# Altium PCB AMSController.PcbDoc (part 1 of 2)
Units mm, origin at the board's own origin, x right, y up, seen from the top; angles counter-clockwise.
Board outline 99 x 99 mm, 4 copper layers (Top Layer, Internal Plane 1, Internal Plane 2, Bottom Layer), stack 0.462 mm thick; 150 components, 143 nets, 485 pads, 129 vias.
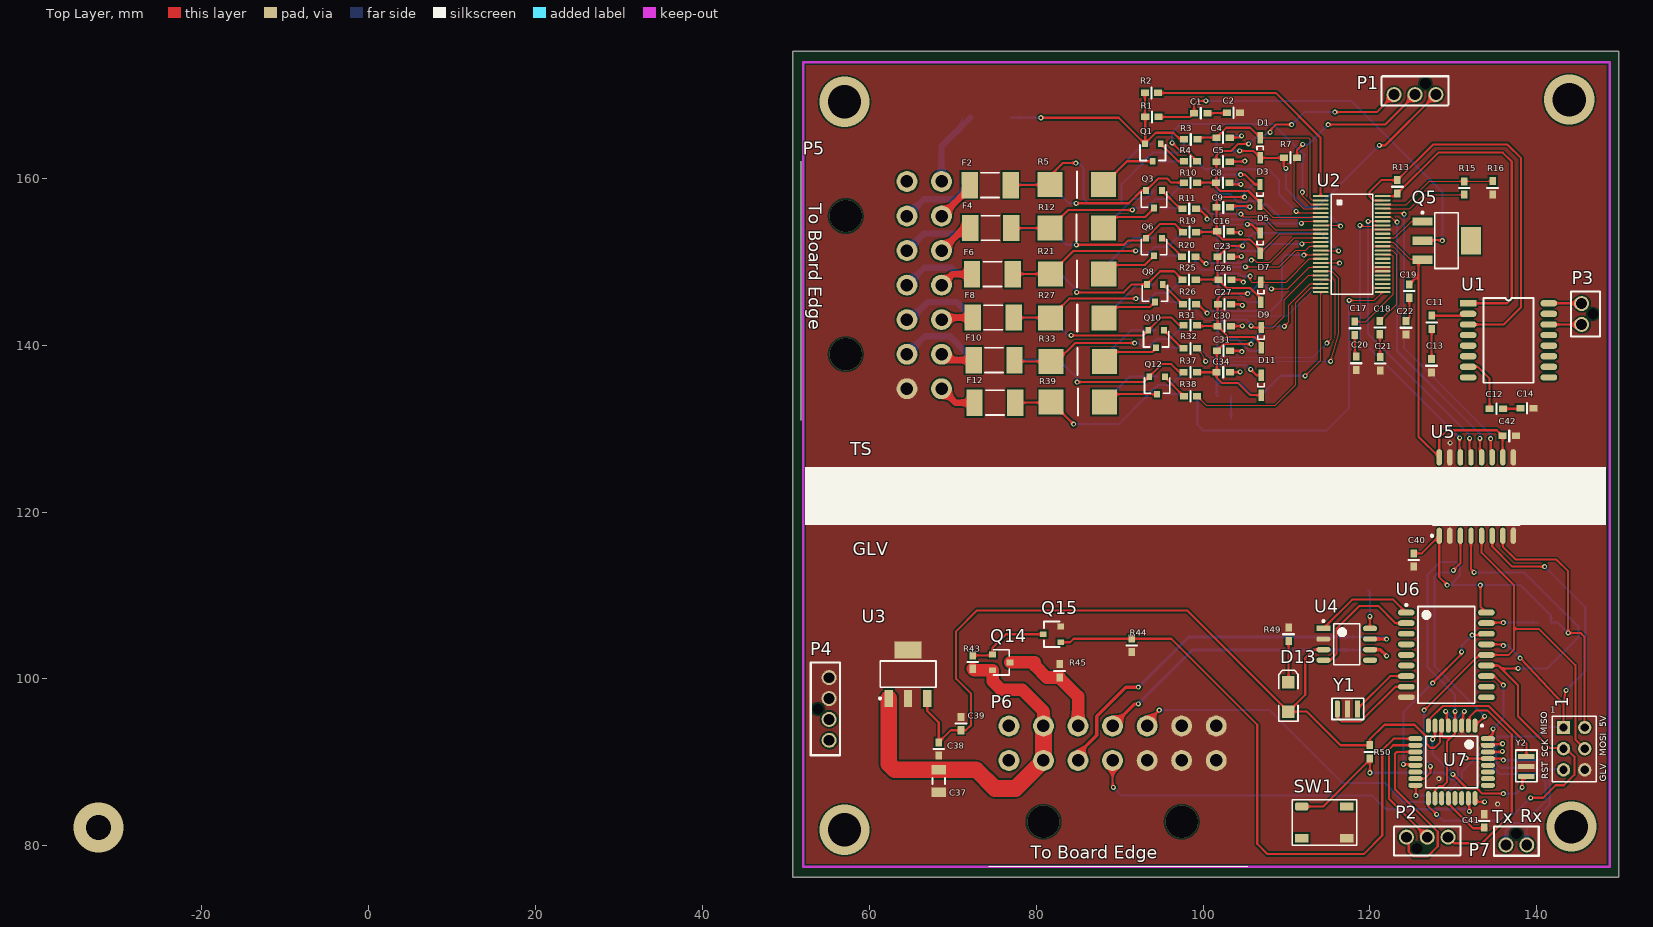
[diagram p0: Top Layer view]
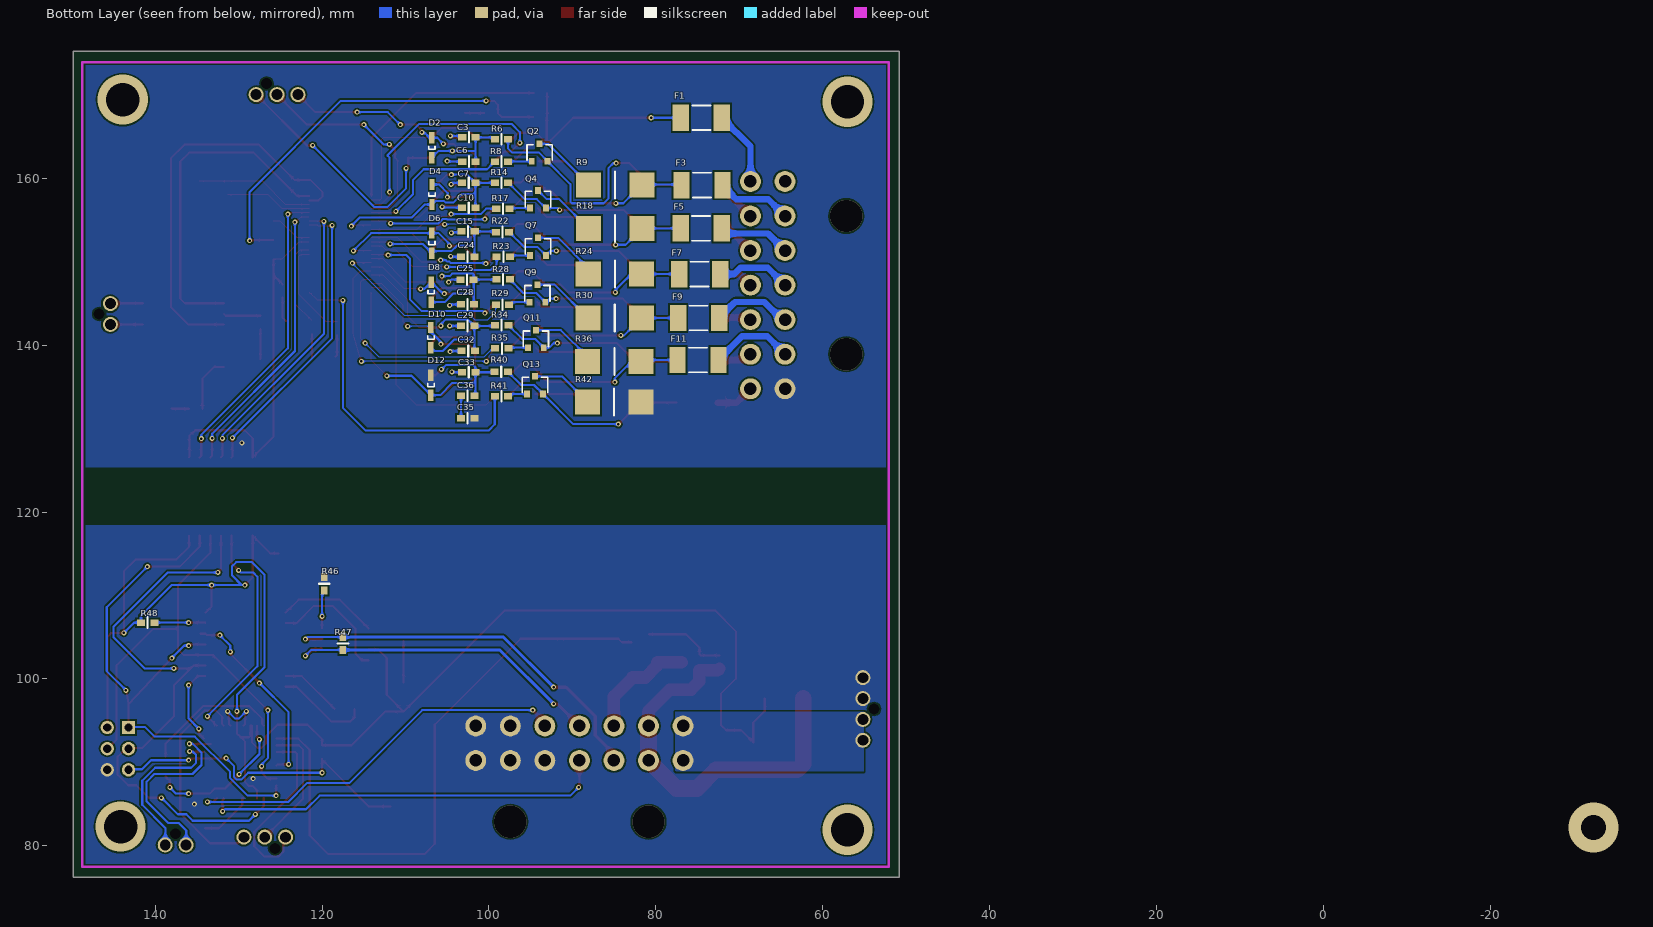
[diagram p1: Bottom Layer view, seen from below]
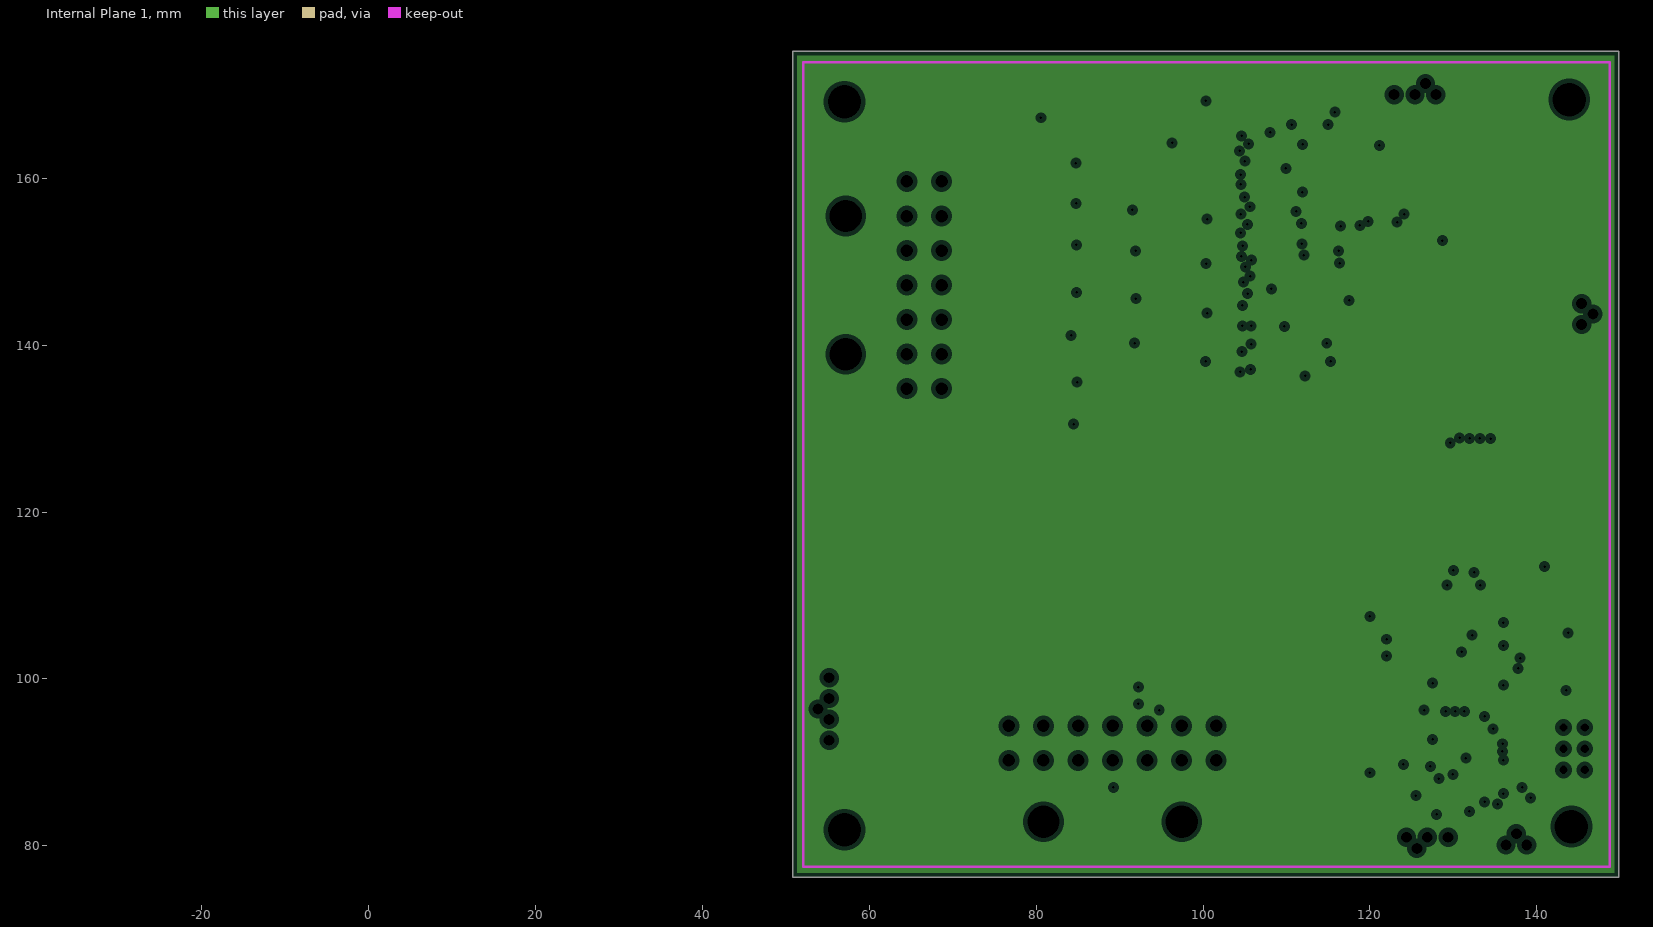
[diagram p2: Internal Plane 1, clearances drawn from the general rule]
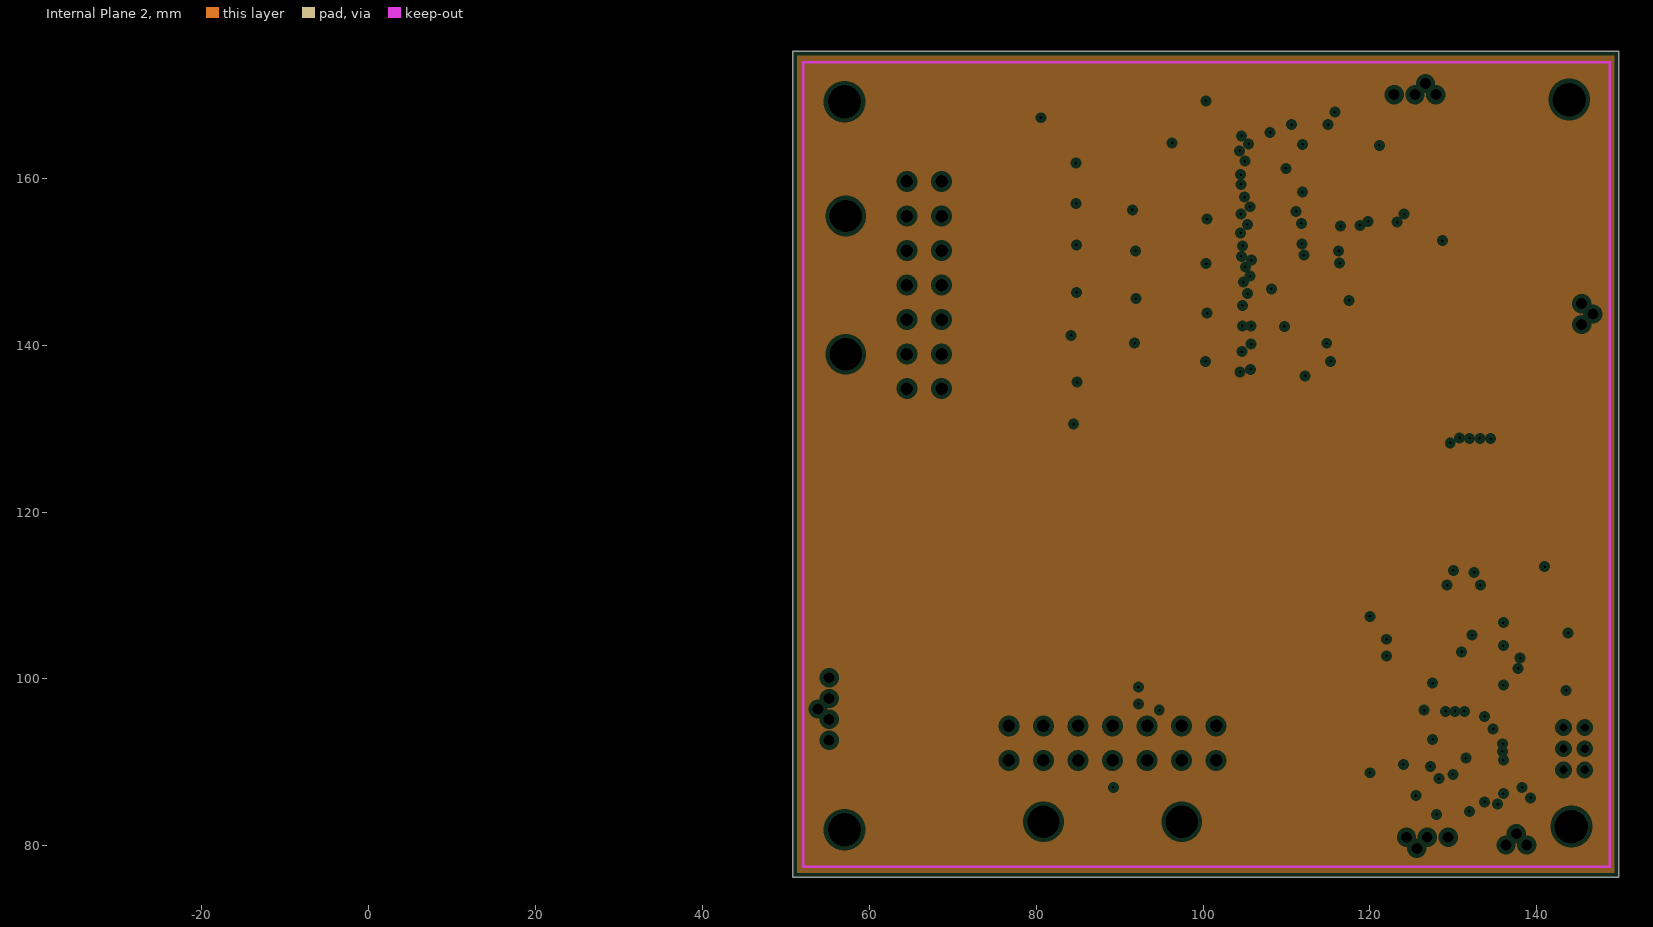
[diagram p3: Internal Plane 2, clearances drawn from the general rule]

## Layer stack, top to bottom
Top Solder: solder mask 0.0102, Solder Resist, Dk 3.5
Top Layer: signal copper 0.0356
Internal Plane 1: plane copper 0.0356
Internal Plane 2: plane copper 0.0356
Dielectric 1: dielectric 0.32, FR-4, Dk 4.8
Bottom Layer: signal copper 0.0356
Bottom Solder: solder mask 0.0102, Solder Resist, Dk 3.5

## Board outline
50.8,76.2 149.8,76.2 149.8,175.2 50.8,175.2

## Design rules (kind name [scope] priority, off if disabled: settings)
Clearance [All] p1: gap=0.2 ignorepadtopadclearanceinfootprint=FALSE
Clearance Clearance_1 [All] p2 off: gap=0.254 ignorepadtopadclearanceinfootprint=FALSE except(0: Arc-Hole Track-Hole SMDPad-Hole THPad-Hole Via-Hole Fill-Hole Poly-Hole Region-Hole Text-Hole)
DiffPairsRouting [All] p1: maxlimit=0.254 minlimit=0.127 mostfreqgap=0.254 toplayer_minwidth=0.127 toplayer_maxwidth=0.381 toplayer_prefwidth=0.25 bottomlayer_minwidth=0.127 bottomlayer_maxwidth=0.381 bottomlayer_prefwidth=0.25 maxuncoupledlength=12.7
HoleSize [All] p1: absolutevalues=TRUE maxlimit=4.5 minlimit=0.025 maxpercent=80.000 minpercent=20.000
MinimumSolderMaskSliver [All] p1: minsoldermaskwidth=0.04
PlaneClearance [All] p1: clearance=0.508
PlaneConnect [All] p1: planeconnectstyle=Relief reliefexpansion=0.508 reliefentries=4 reliefconductorwidth=0.254 reliefairgap=0.254
PolygonConnect [All] p1: connectstyle=Direct reliefconductorwidth=0.5 reliefentries=4 polygonreliefangle="90 Angle" airgapwidth=0.5
RoomDefinition CellMonitor1 [InComponentClass('CellMonitor1')] p1 off: confinementstyle=ConfineIn formatcopy=TRUE lockcomponents=FALSE outline 0,0 50.8,0 50.8,25.4 0,25.4
RoutingVias [All] p1: holewidth=0.3 width=0.6 viastyle="Through Hole" minholewidth=0.3 minwidth=0.6 maxholewidth=0.711 maxwidth=1.27
SilkToSolderMaskClearance [IsPad] p1: minsilkscreentomaskgap=0.18 clearancetoexposedcopper=TRUE
SolderMaskExpansion [All] p1: expansion=0.102
Width [All] p1: maxlimit=10 minlimit=0.127 preferedwidth=0.25
24 further rules are at their usual default settings.

## Classes and differential pairs
component class CellMonitor1: C1 C2 C3 C4 C5 C6 C7 C8 C9 C10 C11 C12 C13 C14 C15 C16 C17 C18 C19 C20 C21 C22 C23 C24 C25 C26 C27 C28 C29 C30 C31 C32 C33 C34 C35 C36 D1 D2 D3 D4 D5 D6 D7 D8 D9 D10 D11 D12 F1 F2 F3 F4 F5 F6 F7 F8 F9 F10 F11 F12 Q1 Q2 Q3 Q4 Q5 Q6 Q7 Q8 Q9 Q10 Q11 Q12 Q13 R1 R2 R3 R4 R5 R6 R7 R8 R9 R10 R11 R12 R13 R14 R15 R16 R17 R18 R19 R20 R21 R22 R23 R24 R25 R26 R27 R28 R29 R30 R31 R32 R33 R34 R35 R36 R37 R38 R39 R40 R41 R42 U1 U2
component class Controller: C37 C38 C39 C40 C41 C42 D13 Q14 Q15 R43 R44 R45 R46 R47 R48 R49 R50 SW1 U3 U4 U5 U6 U7 Y1 Y2
component class IO: 1 P1 P2 P3 P4 P5 P6 P7
differential pair CAN: +CAN_P -CAN_N
differential pair isoSPI: +isoSPI_P -isoSPI_N

## Components (designator, comment, footprint, x,y, rotation, side; value= is the part's Value field where it differs from the comment)
1 "ICSP Connector" "ICSP Connector" 143.225,89.095 r90 top
C1 "Cap" "0603 IMPERIAL" 99.725,167.8 r0 top value=0.22uF
C2 "Cap" "0603 IMPERIAL" 103.65,167.85 r0 top value=0.22uF
C3 "Cap" "0603 IMPERIAL" 102.4,164.9 r180 bottom value=22nF
C4 "Cap" "0603 IMPERIAL" 102.4,164.875 r0 top value=22nF
C5 "Cap" "0603 IMPERIAL" 102.4,162 r180 top value=22nF
C6 "Cap" "0603 IMPERIAL" 102.4,162 r0 bottom value=22nF
C7 "Cap" "0603 IMPERIAL" 102.425,159.45 r180 bottom value=22nF
C8 "Cap" "0603 IMPERIAL" 102.375,159.475 r0 top value=22nF
C9 "Cap" "0603 IMPERIAL" 102.425,156.5 r180 top value=22nF
C10 "Cap" "0603 IMPERIAL" 102.425,156.475 r0 bottom value=22nF
C11 "Cap" "0603 IMPERIAL" 127.4,142.725 r270 top value=22nF
C12 "Cap" "0603 IMPERIAL" 135.15,132.375 r0 top value=22nF
C13 "Cap" "0603 IMPERIAL" 127.375,137.525 r270 top value=22nF
C14 "Cap" "0603 IMPERIAL" 138.825,132.425 r0 top value=22nF
C15 "Cap" "0603 IMPERIAL" 102.5,153.625 r180 bottom value=22nF
C16 "Cap" "0603 IMPERIAL" 102.5,153.625 r0 top value=22nF
C17 "Cap" "0603 IMPERIAL" 118.2,142.025 r270 top value=2.2uF
C18 "Cap" "0603 IMPERIAL" 121.2,142.1 r270 top value=2.2uF
C19 "Cap" "0603 IMPERIAL" 124.725,146.475 r270 top value=2.2uF
C20 "Cap" "0603 IMPERIAL" 118.375,137.825 r270 top value=2.2uF
C21 "Cap" "0603 IMPERIAL" 121.225,137.775 r270 top value=2.2uF
C22 "Cap" "0603 IMPERIAL" 124.325,142.075 r270 top value=2.2uF
C23 "Cap" "0603 IMPERIAL" 102.55,150.575 r180 top value=22nF
C24 "Cap" "0603 IMPERIAL" 102.55,150.575 r0 bottom value=22nF
C25 "Cap" "0603 IMPERIAL" 102.625,147.85 r180 bottom value=22nF
C26 "Cap" "0603 IMPERIAL" 102.625,147.85 r0 top value=22nF
C27 "Cap" "0603 IMPERIAL" 102.575,144.9 r180 top value=22nF
C28 "Cap" "0603 IMPERIAL" 102.575,144.875 r0 bottom value=22nF
C29 "Cap" "0603 IMPERIAL" 102.55,142.3 r180 bottom value=22nF
C30 "Cap" "0603 IMPERIAL" 102.55,142.28 r0 top value=22nF
C31 "Cap" "0603 IMPERIAL" 102.45,139.325 r180 top value=22nF
C32 "Cap" "0603 IMPERIAL" 102.475,139.3 r0 bottom value=22nF
C33 "Cap" "0603 IMPERIAL" 102.425,136.75 r180 bottom value=22nF
C34 "Cap" "0603 IMPERIAL" 102.425,136.75 r0 top value=22nF
C35 "Cap" "0603 IMPERIAL" 102.55,131.225 r180 bottom value=22nF
C36 "Cap" "0603 IMPERIAL" 102.55,133.925 r0 bottom value=22nF
C37 "0.33uF" C1206 68.326,87.757 r90 top
C38 "0.1uF" "0603 IMPERIAL" 68.326,91.598 r270 top
C39 "0.1uF" "0603 IMPERIAL" 70.993,94.646 r90 top
C40 "0.1uF" "0603 IMPERIAL" 125.25,114.25 r90 top
C41 "0.1uF" "0603 IMPERIAL" 133.675,82.975 r90 top
C42 "0.1uF" "0603 IMPERIAL" 136.7,129.116 r180 top
D1 "6.8V" SOD-323 106.85,164.85 r270 top
D2 "6.8V" SOD-323 106.85,162.45 r90 bottom
D3 "6.8V" SOD-323 106.825,156.85 r90 top
D4 "6.8V" SOD-323 106.825,156.85 r90 bottom
D5 "6.8V" SOD-323 106.85,151.025 r90 top
D6 "6.8V" SOD-323 106.85,151.025 r90 bottom
D7 "6.8V" SOD-323 106.925,145.15 r90 top
D8 "6.8V" SOD-323 106.925,145.15 r90 bottom
D9 "6.8V" SOD-323 106.95,139.7 r90 top
D10 "6.8V" SOD-323 106.95,139.7 r90 bottom
D11 "6.8V" SOD-323 106.95,134 r90 top
D12 "6.8V" SOD-323 106.95,134 r90 bottom
D13 "LED2" 3.2X1.6X1.1 110.236,97.818 r90 top
F1 "0451.500NRL" 0451.500NRL 74.545,167.25 r0 bottom
F2 "0451.500NRL" 0451.500NRL 74.48,159.175 r0 top
F3 "0451.500NRL" 0451.500NRL 74.47,159.175 r0 bottom
F4 "0451.500NRL" 0451.500NRL 74.545,154.025 r0 top
F5 "0451.500NRL" 0451.500NRL 74.57,154 r0 bottom
F6 "0451.500NRL" 0451.500NRL 74.755,148.5 r0 top
F7 "0451.500NRL" 0451.500NRL 74.745,148.5 r0 bottom
F8 "0451.500NRL" 0451.500NRL 74.855,143.3 r0 top
F9 "0451.500NRL" 0451.500NRL 74.87,143.25 r0 bottom
F10 "0451.500NRL" 0451.500NRL 74.955,138.2 r0 top
F11 "0451.500NRL" 0451.500NRL 74.945,138.225 r0 bottom
F12 "0451.500NRL" 0451.500NRL 75.055,133.1 r0 top
P1 "Header 3" "3-pin Vertical nanofit" 122.9,170.025 r0 top
P2 "Header 3" "3-pin Vertical nanofit" 129.373,81.026 r180 top
P3 "Header 2" "2 Pin Nanofit" 145.4,147.45 r270 top
P4 "Header 4" "4 Pin Vertical Nanofit" 55.188,92.643 r90 top
P5 "14 Pin Connector" "TE Connectivity 14 Pin" 49.816,142.013 r270 top
P6 "14 Pin Connector" "TE Connectivity 14 Pin" 94.334,75.521 r0 top
P7 "Header 7" "2 Pin Nanofit" 133.825,80.125 r0 top
Q1 "P-Channel" SOT23F 93.975,163.082 r270 top
Q2 "P-Channel" SOT23F 93.925,163.075 r90 bottom
Q3 "P-Channel" SOT23F 94.125,157.475 r270 top
Q4 "P-Channel" SOT23F 94.125,157.475 r90 bottom
Q5 "NPN" SOT223_N 129.185,152.525 r0 top
Q6 "P-Channel" SOT23F 94.125,151.775 r270 top
Q7 "P-Channel" SOT23F 94.125,151.8 r90 bottom
Q8 "P-Channel" SOT23F 94.225,146.225 r270 top
Q9 "P-Channel" SOT23F 94.2,146.2 r90 bottom
Q10 "P-Channel" SOT23F 94.375,140.725 r270 top
Q11 "P-Channel" SOT23F 94.375,140.75 r90 bottom
Q12 "P-Channel" SOT23F 94.5,135.175 r270 top
Q13 "P-Channel" SOT23F 94.475,135.2 r90 bottom
Q14 "MOSFET-P" SOT23f 75.819,101.981 r0 top
Q15 "MOSFET-N" SOT23f 81.881,105.344 r180 top
R1 "Res1" "0603 IMPERIAL" 93.875,167.347 r0 top value=140
R2 "Res1" "0603 IMPERIAL" 93.825,170.225 r0 top value=140
R3 "Res1" "0603 IMPERIAL" 98.525,164.65 r0 top value=100
R4 "Res1" "0603 IMPERIAL" 98.5,162.025 r0 top value=3.3K
R5 "Res1" "2512 IMPERIAL" 84.875,159.225 r0 top value=12
R6 "Res1" "0603 IMPERIAL" 98.5,164.675 r0 bottom value=100
R7 "Res1" "0603 IMPERIAL" 110.475,162.475 r0 top value=0
R8 "Res1" "0603 IMPERIAL" 98.5,162 r0 bottom value=3.3K
R9 "Res1" "2512 IMPERIAL" 84.875,159.2 r0 bottom value=12
R10 "Res1" "0603 IMPERIAL" 98.5,159.475 r0 top value=100
R11 "Res1" "0603 IMPERIAL" 98.35,156.35 r0 top value=3.3K
R12 "Res1" "2512 IMPERIAL" 84.85,154.025 r0 top value=12
R13 "120" "0603 IMPERIAL" 123.293,158.975 r270 top
R14 "Res1" "0603 IMPERIAL" 98.5,159.475 r0 bottom value=100
R15 "1K" "0603 IMPERIAL" 131.302,158.829 r90 top
R16 "1K" "0603 IMPERIAL" 134.7,158.85 r270 top
R17 "Res1" "0603 IMPERIAL" 98.325,156.35 r0 bottom value=3.3K
R18 "Res1" "2512 IMPERIAL" 84.875,153.975 r0 bottom value=12
R19 "Res1" "0603 IMPERIAL" 98.375,153.55 r0 top value=100
R20 "Res1" "0603 IMPERIAL" 98.3,150.575 r0 top value=3.3K
R21 "Res1" "2512 IMPERIAL" 84.9,148.525 r0 top value=12
R22 "Res1" "0603 IMPERIAL" 98.375,153.55 r0 bottom value=100
R23 "Res1" "0603 IMPERIAL" 98.275,150.575 r0 bottom value=3.3K
R24 "Res1" "2512 IMPERIAL" 84.9,148.525 r0 bottom value=12
R25 "Res1" "0603 IMPERIAL" 98.325,147.85 r0 top value=100
R26 "Res1" "0603 IMPERIAL" 98.375,144.9 r0 top value=3.3K
R27 "Res1" "2512 IMPERIAL" 84.925,143.25 r0 top value=12
R28 "Res1" "0603 IMPERIAL" 98.3,147.875 r0 bottom value=100
R29 "Res1" "0603 IMPERIAL" 98.375,144.85 r0 bottom value=3.3K
R30 "Res1" "2512 IMPERIAL" 84.925,143.25 r0 bottom value=12
R31 "Res1" "0603 IMPERIAL" 98.475,142.4 r0 top value=100
R32 "Res1" "0603 IMPERIAL" 98.475,139.6 r0 top value=3.3K
R33 "Res1" "2512 IMPERIAL" 84.975,138.05 r0 top value=12
R34 "Res1" "0603 IMPERIAL" 98.475,142.4 r0 bottom value=100
R35 "Res1" "0603 IMPERIAL" 98.45,139.6 r0 bottom value=3.3K
R36 "Res1" "2512 IMPERIAL" 84.975,138.05 r0 bottom value=12
R37 "Res1" "0603 IMPERIAL" 98.475,136.75 r0 top value=100
R38 "Res1" "0603 IMPERIAL" 98.5,133.875 r0 top value=3.3K
R39 "Res1" "2512 IMPERIAL" 85,133.2 r0 top value=12
R40 "Res1" "0603 IMPERIAL" 98.525,136.8 r0 bottom value=100
R41 "Res1" "0603 IMPERIAL" 98.5,133.875 r0 bottom value=3.3K
R42 "Res1" "2512 IMPERIAL" 85,133.2 r0 bottom value=12
R43 "10k" "0603 IMPERIAL" 72.39,102.012 r270 top value=10K
R44 "100k" "0603 IMPERIAL" 91.44,104.013 r90 top value=10K
R45 "100k" "0603 IMPERIAL" 82.804,100.965 r270 top value=100K
R46 "16.9K" "0603 IMPERIAL" 119.75,111.4 r90 bottom
R47 "120" "0603 IMPERIAL" 117.5,104.25 r90 bottom
R48 "10K" "0603 IMPERIAL" 140.9,106.75 r0 bottom
R49 "1K" "0603 IMPERIAL" 110.25,105.35 r270 top
R50 "10K" "0603 IMPERIAL" 120,91.25 r90 top
SW1 "PTS525SM15SMTR2" PTS525SM15SMTR2 111.821,84.709 r0 top
U1 "TG110-AE050N5" "Halo N5" 131.775,145.015 r0 top
U2 "LTC6811-1" SSOP-48 114.1,157.85 r0 top
U3 "UA7805CKTTR" SOT223 64.643,100.838 r90 top
U4 "MCP2551-E/SN" SOIC127P600X175-8M 117.221,104.14 r0 top
U5 "ISO7341CDW" SOIC16-WB 132.75,121.85 r90 top
U6 "MCP2515-E/ST" SOIC127P1030X265-18M 129.159,102.87 r0 top
U7 "ATMEGA328P" "ATMEGA328P-15AZ - 2" 129.794,90.043 r270 top
Y1 "CSTCE16M0V53-R0" CSTCE16M0V53-R0 116.091,96.393 r0 top
Y2 "CSTCE16M0V53-R0" CSTCE16M0V53-R0 138.75,88.3 r90 top

## Footprints (in the part's own frame and the unit in brackets; to place one, negate y for a bottom-side part, rotate by r counter-clockwise, add the part's x,y. Pads: shape width x height; smd on the part's side, far side on the other; paste and mask are expansions set on the pad)
"2 Pin Nanofit" [mm]
  round 1.8 hole 1.3: 1(2.475,-0.025) 2(4.975,-0.025)
  round 0 hole 1.3: 3(3.725,1.315)
  silkscreen extent 1.02,-1.33 6.4,2.17
"3-pin Vertical nanofit" [mm]
  round 1.8 hole 1.3: 1(0,0) 2(2.5,0) 3(5,0)
  round 0 hole 1.3: 6(3.75,1.34)
  silkscreen extent -1.5,-1.3 6.5,2.2
3.2X1.6X1.1 [mm] "SMT LED; 2 Flat Leads"
  rect 1.5x1.5 smd: 1(-1.75,0) 2(1.75,0)
  silkscreen extent -2.9,-1.15 3.2,1.15
"4 Pin Vertical Nanofit" [mm]
  round 1.8 hole 1.3: 1(0,0) 2(2.5,0) 3(5,0) 4(7.5,0)
  round 0 hole 1.3: 6(3.75,1.34)
  silkscreen extent -1.8,-1.3 9.3,2.2
0451.500NRL [mm] "Fuse Board MNT 500mA 125VAC/DC"
  rect 1.96x3.15 smd: 1(-2.455,0) 2(2.455,0)
  silkscreen extent -1.1,-1.48 1.1,1.47, body extent -3.15,-1.47 3.15,1.47, height 2.94
"0603 IMPERIAL" [mil]
  rect 38x31 smd: 1(-31.5,0) 2(31.5,0)
  silkscreen extent 0,-25 0,25
"2512 IMPERIAL" [mm]
  rect 3x3 smd: 1(-3.2,0) 2(3.2,0)
  silkscreen extent 0,-1.6 0,1.6
"ATMEGA328P-15AZ - 2" [mm] "TQFP, 32-Leads, Body 7.00x7.00mm, Pitch 0.80mm, IPC Low Density"
  oval 1.7x0.6 smd: 1(-4.35,2.8) 2(-4.35,2) 3(-4.35,1.2) 4(-4.35,0.4) 5(-4.35,-0.4) 6(-4.35,-1.2) 7(-4.35,-2) 8(-4.35,-2.8) 17(4.35,-2.8) 18(4.35,-2) 19(4.35,-1.2) 20(4.35,-0.4) 21(4.35,0.4) 22(4.35,1.2) 23(4.35,2) 24(4.35,2.8)
  oval 0.6x1.7 smd: 9(-2.8,-4.35) 10(-2,-4.35) 11(-1.2,-4.35) 12(-0.4,-4.35) 13(0.4,-4.35) 14(1.2,-4.35) 15(2,-4.35) 16(2.8,-4.35) 25(2.8,4.35) 26(2,4.35) 27(1.2,4.35) 28(0.4,4.35) 29(-0.4,4.35) 30(-1.2,4.35) 31(-2,4.35) 32(-2.8,4.35)
  silkscreen extent -4.47,-3.1 3.1,3.77, body extent -3.5,-3.5 3.5,3.5, height 1.2
C1206 [mm] "Chip Capacitor, Body 3.2x1.6mm, IPC High Density"
  rect 1.1x1.7 smd: 1(-1.35,0) 2(1.35,0)
  silkscreen extent -0.4,-0.75 0.4,0.75, body extent -1.7,-0.9 1.7,0.9, height 1.3
CSTCE16M0V53-R0 [mm] "16MHz Resonator"
  rrect50% 0.6x2 smd: 1(0,0)
  rect 0.6x2 smd: 2(1.2,0) 3(2.4,0)
  silkscreen extent -0.64,-1.27 3.17,1.27
"Halo N5" [mm]
  rect 2x0.76 smd: 1(0,0)
  oval 2x0.76 smd: 2(0,-1.27) 3(0,-2.54) 4(0,-3.81) 5(0,-5.08) 6(0,-6.35) 7(0,-7.62) 8(0,-8.89) 9(9.67,-8.89) 10(9.67,-7.62) 11(9.67,-6.35) 12(9.67,-5.08) 13(9.67,-3.81) 14(9.67,-2.54) 15(9.67,-1.27) 16(9.67,0)
  silkscreen extent 1.84,-9.53 7.84,0.64
"ICSP Connector" [mm]
  rect 1.6x1.6 hole 1: 1(5.08,0.025)
  round 1.6 hole 1: 2(5.08,-2.515) 3(2.54,0.025) 4(2.54,-2.515) 5(0,0.025) 6(0,-2.515)
  silkscreen extent -1.45,-3.91 6.45,1.4
PTS525SM15SMTR2 [mm] "Tact Switch"
  rrect50% 1.6x1 smd: 1(0,0)
  rect 1.6x1 smd: 2(5.4,0) 3(0,-3.8) 4(5.4,-3.8)
  silkscreen extent -1.12,-4.65 6.58,0.81
SOD-323 [mm] "FLYBACK DIODE"
  rect 1.35x0.65 smd: 1(2.4,0) 2(0,0)
  silkscreen extent 1.02,-0.38 1.4,0.38
SOIC16-WB [mm] "Wide Body 16 pin SOIC"
  oval 1.95x0.65 smd: 1(-4.7,4.445) 2(-4.7,3.175) 3(-4.7,1.905) 4(-4.7,0.635) 5(-4.7,-0.635) 6(-4.7,-1.905) 7(-4.7,-3.175) 8(-4.7,-4.445) 9(4.7,-4.445) 10(4.7,-3.175) 11(4.7,-1.905) 12(4.7,-0.635) 13(4.7,0.635) 14(4.7,1.905) 15(4.7,3.175) 16(4.7,4.445)
  silkscreen extent -4.82,-5.2 3.4,5.44, body extent -3.8,-5.2 3.8,5.2, height 2.65
SOIC127P600X175-8M [mm] "SOIC, 8-Leads, Body 4.90x3.90mm, Pitch 1.27mm, IPC Low Density"
  rect 1.7x0.65 smd: 1(-2.8,1.905)
  oval 1.7x0.65 smd: 2(-2.8,0.635) 3(-2.8,-0.635) 4(-2.8,-1.905) 5(2.8,-1.905) 6(2.8,-0.635) 7(2.8,0.635) 8(2.8,1.905)
  silkscreen extent -2.92,-2.45 1.55,2.9, body extent -1.95,-2.45 1.95,2.45, height 1.75
SOIC127P1030X265-18M [mm] "SOIC, 18-Leads, Body 11.50x7.50mm, Pitch 1.27mm, IPC Low Density"
  oval 2x0.7 smd: 1(-4.8,5.08) 2(-4.8,3.81) 3(-4.8,2.54) 4(-4.8,1.27) 5(-4.8,0) 6(-4.8,-1.27) 7(-4.8,-2.54) 8(-4.8,-3.81) 9(-4.8,-5.08) 10(4.8,-5.08) 11(4.8,-3.81) 12(4.8,-2.54) 13(4.8,-1.27) 14(4.8,0) 15(4.8,1.27) 16(4.8,2.54) 17(4.8,3.81) 18(4.8,5.08)
  silkscreen extent -4.92,-5.8 3.4,6.1, body extent -3.8,-5.8 3.8,5.8, height 2.65
SOT23F [mm] "SOT23, 3-Leads, Body 2.90x2.40mm, Pitch 0.95mm, IPC Medium Density"
  rect 0.8x0.7 smd: 1(1.05,0) 2(-1.05,0.95) 3(-1.05,-0.95)
  silkscreen extent -0.92,-1.52 0.95,1.52
SOT23f [mm] "SOT23, 3-Leads, Body 2.90x2.40mm, Pitch 0.95mm, IPC Medium Density"
  rect 0.8x0.7 smd: 1(1.05,0) 2(-1.05,0.95) 3(-1.05,-0.95)
  silkscreen extent -0.92,-1.52 0.95,1.52
SOT223 [mm] "SOT223, 4-Leads, Body 6.50x7.00mm (avg), Pitch 2.30mm, IPC Low Density"
  rect 2.05x1 smd: 1(-3.175,2.3) 2(-3.175,0) 3(-3.175,-2.3)
  rect 2.05x3.25 smd: 4(2.6,0)
  silkscreen extent -3.3,-3.35 1.3,3.47, body extent -1.85,-3.35 1.3,3.35, height 1.8
SOT223_N [mm] "SOT223, 4-Leads, Body 6.5x3.5mm, Pitch 2.3mm, Lead Span 7mm, IPC Medium Density"
  rect 2.4x1 smd: 1(-2.9,2.3) 2(-2.9,0) 3(-2.9,-2.3)
  rect 2.4x3.3 smd: 4(2.9,0)
  silkscreen extent -3.02,-3.35 1.4,3.47, body extent -1.85,-3.35 1.85,3.35, height 1.7
SSOP-48 [mm]
  rect 1.9x0.25 smd: 1(0,0)
  oval 1.9x0.25 smd: 2(0,-0.5) 3(0,-1) 4(0,-1.5) 5(0,-2) 6(0,-2.5) 7(0,-3) 8(0,-3.5) 9(0,-4) 10(0,-4.5) 11(0,-5) 12(0,-5.5) 13(0,-6) 14(0,-6.5) 15(0,-7) 16(0,-7.5) 17(0,-8) 18(0,-8.5) 19(0,-9) 20(0,-9.5) 21(0,-10) 22(0,-10.5) 23(0,-11) 24(0,-11.5) 25(7.425,-11.5) 26(7.425,-11) 27(7.425,-10.5) 28(7.425,-10) 29(7.425,-9.5) 30(7.425,-9) 31(7.425,-8.5) 32(7.425,-8) 33(7.425,-7.5) 34(7.425,-7) 35(7.425,-6.5) 36(7.425,-6) 37(7.425,-5.5) 38(7.425,-5) 39(7.425,-4.5) 40(7.425,-4) 41(7.425,-3.5) 42(7.425,-3) 43(7.425,-2.5) 44(7.425,-2) 45(7.425,-1.5) 46(7.425,-1) 47(7.425,-0.5) 48(7.425,0)
  silkscreen extent 1.25,-11.75 6.25,0.25
"TE Connectivity 14 Pin" [mm]
  round 2.5 hole 1.5: 1(7.24,14.7) 2(7.24,18.84) 3(3.1,14.7) 4(3.1,18.84) 5(-1.04,14.7) 6(-1.04,18.84) 7(-5.18,14.7) 8(-5.18,18.84) 9(-9.32,14.7) 10(-9.32,18.84) 11(-13.46,14.7) 12(-13.46,18.84) 13(-17.6,14.7) 14(-17.6,18.84)
  silkscreen extent -20,2.03 11,2.03

## Part data
1: Supplier Part Number=952-2121-ND
C1 C2: "Capacitor", Supplier Part Number=490-5402-1-ND, LatestRevisionDate=17-Jul-2002, LatestRevisionNote="Re-released for DXP Platform.", PackageDescription="Radial Cap, Thru-Hole; 2 Leads; 0.3 in Pin Spacing", PackageReference=RAD-0.3, Published=8-Jun-2000, Publisher="Altium Limited"
C3 C4 C5 C6 C7 C8 C9 C10 C11 C12 C13 C14 C15 C16 C23 C24 C25 C26 C27 C28 C29 C30 C31 C32 C33 C34 C35 C36: "Capacitor", Supplier Part Number=399-3476-1-ND, LatestRevisionDate=17-Jul-2002, LatestRevisionNote="Re-released for DXP Platform.", PackageDescription="Radial Cap, Thru-Hole; 2 Leads; 0.3 in Pin Spacing", PackageReference=RAD-0.3, Published=8-Jun-2000, Publisher="Altium Limited"
C17 C18 C19 C20 C21 C22: "Capacitor", Supplier Part Number=490-3296-1-ND, LatestRevisionDate=17-Jul-2002, LatestRevisionNote="Re-released for DXP Platform.", PackageDescription="Radial Cap, Thru-Hole; 2 Leads; 0.3 in Pin Spacing", PackageReference=RAD-0.3, Published=8-Jun-2000, Publisher="Altium Limited"
C37: library part "Cap Semi", "Capacitor (Semiconductor SIM Model)", Supplier Part Number=445-4464-1-ND, LatestRevisionDate=29-May-2009, LatestRevisionNote="IPC-7351 Footprint Added.", PackageDescription="Chip Capacitor", PackageReference=C1206, Published=8-Jun-2000, Publisher="Altium Limited"
C38 C39 C40 C41 C42: library part Cap, "Capacitor", Supplier Part Number=399-1095-1-ND, LatestRevisionDate=17-Jul-2002, LatestRevisionNote="Re-released for DXP Platform.", Published=8-Jun-2000, Publisher="Altium Limited"
D1 D2 D3 D4 D5 D6 D7 D8 D9 D10 D11 D12: library part "D Zener", "Zener Diode", Supplier Part Number=568-6455-1-ND, LatestRevisionDate=17-Jul-2002, LatestRevisionNote="Re-released for DXP Platform.", PackageDescription="Diode, Thru-Hole; 2 Leads; 0.7 in Pin Spacing", PackageReference=DIODE-0.7, Published=8-Jun-2000, Publisher="Altium Limited"
D13: "Typical RED, GREEN, YELLOW, AMBER GaAs LED", Supplier Part Number=160-1456-1-ND, LatestRevisionDate=17-Jul-2002, LatestRevisionNote="Re-released for DXP Platform.", PackageDescription="SM LED; 2 Flat Leads", PackageReference=3.2X1.6X1.1, PackageVersion=Feb-2002, Published=8-Jun-2000, Publisher="Altium Limited"
F1 F2 F5 F6 F7 F8 F9 F11: library part "Fuse 1", "Fuse", Supplier Part Number=F5964CT-ND, LatestRevisionDate=17-Jul-2002, LatestRevisionNote="Re-released for DXP Platform.", PackageReference=PIN-W2/E2.8, Published=8-Jun-2000, Publisher="Altium Limited"
F3 F4 F10 F12: library part "Fuse 1", "Fuse", LatestRevisionDate=17-Jul-2002, LatestRevisionNote="Re-released for DXP Platform.", PackageReference=PIN-W2/E2.8, Published=8-Jun-2000, Publisher="Altium Limited"
P1 P2: "Header, 3-Pin", LatestRevisionDate=17-Jul-2002, LatestRevisionNote="Re-released for DXP Platform.", Publisher="Altium Limited"
P3: "Header, 2-Pin", LatestRevisionDate=17-Jul-2002, LatestRevisionNote="Re-released for DXP Platform.", Publisher="Altium Limited"
P4: "Header, 4-Pin", LatestRevisionDate=17-Jul-2002, LatestRevisionNote="Re-released for DXP Platform.", Publisher="Altium Limited"
P5 P6: Supplier Part Number=A32482-ND
P7: library part "Header 2", "Header, 2-Pin", LatestRevisionDate=17-Jul-2002, LatestRevisionNote="Re-released for DXP Platform.", Publisher="Altium Limited"
Q1 Q2 Q3 Q4 Q6 Q7 Q8 Q9 Q10 Q11 Q12 Q13: library part MOSFET-P, "P-Channel MOSFET", Supplier Part Number="BSS308PE H6327CT-ND", LatestRevisionDate=17-Jul-2002, LatestRevisionNote="Re-released for DXP Platform.", PackageDescription="TO, Flat Index; 3 In-Line, Axial Leads; Body Dia. 4.6mm; Lead Dia. 0.5 mm (max)", PackageReference=E3, PackageVersion=1995/1996, Published=8-Jun-2000, Publisher="Altium Limited"
Q5: library part 2N3904, "NPN General Purpose Amplifier", Supplier Part Number=NSV1C201MZ4T1GOSCT-ND, ComponentLink1Description="Manufacturer Link", ComponentLink1URL=http://www.fairchildsemi.com/, ComponentLink2Description=Datasheet, ComponentLink2URL=http://www.fairchildsemi.com/ds/2N%2F2N3904.pdf, DatasheetVersion=1997, LatestRevisionDate=15-Jan-2003, LatestRevisionNote="PCB Footprint 'BCY-W3/D4.7' replaced", PackageDescription="TO, Flat Index; 3 In-Line, Axial Leads; Body Dia. 4.5mm; Leads 0.51 x 0.48 mm (max)", PackageReference=TO-92A, PackageVersion=Sep-1998, Published=8-Jun-2000, Publisher="Altium Limited"
Q14: "P-Channel MOSFET", Supplier Part Number="BSS308PE H6327CT-ND", LatestRevisionDate=17-Jul-2002, LatestRevisionNote="Re-released for DXP Platform.", PackageDescription="TO, Flat Index; 3 In-Line, Axial Leads; Body Dia. 4.6mm; Lead Dia. 0.5 mm (max)", PackageReference=E3, PackageVersion=1995/1996, Published=8-Jun-2000, Publisher="Altium Limited"
Q15: "N-Channel MOSFET", Supplier Part Number=DMN3404LDICT-ND, LatestRevisionDate=17-Jul-2002, LatestRevisionNote="Re-released for DXP Platform.", PackageDescription="TO, Flat Index; 3 In-Line, Axial Leads; Body Dia. 4.6mm; Lead Dia. 0.5 mm (max)", PackageReference=E3, PackageVersion=1995/1996, Published=8-Jun-2000, Publisher="Altium Limited"
R1 R2: "Resistor", Supplier Part Number=P140HCT-ND, LatestRevisionDate=17-Jul-2002, LatestRevisionNote="Re-released for DXP Platform.", PackageDescription="Axial Device, Thru-Hole; 2 Leads; 0.3 in Pin Spacing", PackageReference=AXIAL-0.3, Published=8-Jun-2000, Publisher="Altium Limited"
R3 R6 R10 R14 R19 R22 R25 R28 R31 R34 R37 R40: "Resistor", Supplier Part Number=311-100HRCT-ND, LatestRevisionDate=17-Jul-2002, LatestRevisionNote="Re-released for DXP Platform.", PackageDescription="Axial Device, Thru-Hole; 2 Leads; 0.3 in Pin Spacing", PackageReference=AXIAL-0.3, Published=8-Jun-2000, Publisher="Altium Limited"
R4 R8 R11 R17 R20 R23 R26 R29 R32 R35 R38 R41: "Resistor", Supplier Part Number=311-3.30KHRCT-ND, LatestRevisionDate=17-Jul-2002, LatestRevisionNote="Re-released for DXP Platform.", PackageDescription="Axial Device, Thru-Hole; 2 Leads; 0.3 in Pin Spacing", PackageReference=AXIAL-0.3, Published=8-Jun-2000, Publisher="Altium Limited"
R5 R9 R12 R18 R21 R24 R27 R30 R33 R36 R39 R42: "Resistor", Supplier Part Number=RMCF2512FT12R0CT-ND, LatestRevisionDate=17-Jul-2002, LatestRevisionNote="Re-released for DXP Platform.", PackageDescription="Axial Device, Thru-Hole; 2 Leads; 0.3 in Pin Spacing", PackageReference=AXIAL-0.3, Published=8-Jun-2000, Publisher="Altium Limited"
R7: "Resistor", Supplier Part Number=311-0.0JRTR-ND, LatestRevisionDate=17-Jul-2002, LatestRevisionNote="Re-released for DXP Platform.", PackageDescription="Axial Device, Thru-Hole; 2 Leads; 0.3 in Pin Spacing", PackageReference=AXIAL-0.3, Published=8-Jun-2000, Publisher="Altium Limited"
R13 R47: library part Res1, "Resistor", Supplier Part Number=311-120HRCT-ND
R15 R16 R49: library part Res1, "Resistor", Supplier Part Number=311-1.0KGRCT-ND
  R15 R16: LatestRevisionDate=17-Jul-2002, LatestRevisionNote="Re-released for DXP Platform.", PackageDescription="Axial Device, Thru-Hole; 2 Leads; 0.3 in Pin Spacing", PackageReference=AXIAL-0.3, Published=8-Jun-2000, Publisher="Altium Limited"
R43 R48 R50: library part Res1, "Resistor", Supplier Part Number=MCT0603-10.0K-CFCT-ND
R44 R45: library part Res1, "Resistor", Supplier Part Number=RR08P100KDCT-ND
R46: library part Res1, "Resistor", Supplier Part Number=P16.9KDBCT-ND
SW1: Supplier Part Number=CKN9104CT-ND, Supplier 1=Digi-Key
U3: "12V to 5V LDO", Supplier Part Number=296-12290-6-ND
U4: "SOIC", Supplier Part Number=MCP2551-E/SN-ND
U6: "SOIC", Supplier Part Number=MCP2515-I/SO-ND
U7: "TQFN", Supplier Part Number=ATMEGA328P-AU-ND, Supplier 1=Digi-Key
Y1 Y2: Supplier Part Number=490-1198-1-ND
U1: Mouser Part Number=TG110-AE050N5

## Via types
v1: diameter 0.6, hole 0.3, Top Layer to Bottom Layer, 120 vias
v2: diameter 6, hole 4, Top Layer to Bottom Layer, 4 vias
v3: diameter 3.87, hole 3.87, Top Layer to Bottom Layer, 4 vias
v4: diameter 6, hole 3, Top Layer to Bottom Layer, 1 vias

## Nets (pads, with @x,y where several pads share a name; then routed paths per layer and width w, separated by ;. In a path a pad name is that pad's centre, name@x,y a point inside that pad or via, vN(x,y) a via of type N, cw(c..) or ccw(c..) an arc to the next point about the centre after c; other vN are vias at no path point)
5V: 1.2 C38.1 C39.1 C40.2 D13.1 R48.2 R50.2 U3.3 U4.3 U5.1 U5.7 U6.18 U7.4 U7.6 U7.18 | length 205
  Top Layer w0.25: U3.3@66.943,97.663 66.943,96.157 68.326,94.774 C38.1@68.326,92.398 69.774,93.846 C39.1@70.993,93.846 71.571,93.846 72.2,94.475 72.2,98.2 70.4,100 70.4,105.7 72.9,108.2 98.104,108.2 D13.1@110.236,96.068 ; U4.3@114.421,103.505 113.255,103.505 112.25,102.5 112.25,98.082 D13.1@110.236,96.068 ; C40.2@125.25,115.05 126.205,115.05 U5.1@128.305,117.15 128.305,112.195 v1(129.25,111.25) ; U7.18@127.794,85.693 127.794,86.669 128.275,87.15 128.75,87.15 129.225,87.625 129.225,92.475 129.75,93 ; v1(130.2,96.1) 130.2,94.399 U7.4@130.194,94.393 130.194,93.444 129.75,93 ; v1(133.25,111.25) 133.25,108.659 U6.18@133.959,107.95 ; U5.7@135.925,117.15 135.925,115.85 137.475,114.3 142.35,114.3 143.75,112.9 v1(143.75,105.5) 145.25,105.5 145.7,105.05 145.7,94.55 1.2@146,94.25 ; D13.1@110.236,96.068 112.457,96.068 116.475,92.05 R50.2@120,92.05 120,92.75 121.75,94.5 125.337,94.5 126.75,93.087 126.75,92.25 127.25,91.75 127.75,91.75 128.419,92.419 128.419,94.393 U7.6@128.594,94.393 128.594,93.156 128.75,93 129.75,93
  Bottom Layer w0.25: v1(129.25,111.25) 129.65,111.25 ; v1(130.2,96.1) 130.2,98.1 126.9,101.4 126.9,112.5 128.4,114 130.3,114 130.8,113.5 130.8,112.4 129.65,111.25 ; v1(143.75,105.5) 142.5,106.75 R48.2@141.7,106.75 141.7,107.575 138.025,111.25 v1(133.25,111.25) 129.65,111.25
"AMS STATUS": Q15.2 R44.2 U7.9 | length 73.5
  Top Layer w0.25: Q15.2@82.931,104.394 84.069,104.394 84.488,104.813 R44.2@91.44,104.813 96.187,104.813 106.5,94.5 106.5,80.225 107.725,79 119.25,79 121.475,81.225 121.475,91.475 122.843,92.843 U7.9@125.444,92.843
ATMEGA_MISO: 1.1 U5.6 U6.15 U7.16 | length 66.2
  Top Layer w0.25: U7.16@125.444,87.243 125.5,87.187 v1(125.5,86) ; U6.15@133.959,104.14 135.86,104.14 v1(136,104) ; U5.6@134.655,117.15 134.655,115.87 137.075,113.45 v1(140.95,113.45) ; v1(138,102.5) 143.185,96.99 ; 1.1@143.185,94.2 143.185,96.99 ; v1(143.5,98.625) 143.46,98.585 143.185,96.99
  Bottom Layer w0.25: v1(125.5,86) 128.92,86 131.025,88.105 131.025,88.85 135.25,93.075 140.075,93.075 141.25,94.25 1.1@143.46,94.25 ; v1(136,104) 136.5,104 v1(138,102.5) ; v1(140.95,113.45) 145.8,108.6 145.8,100.925 v1(143.5,98.625)
ATMEGA_MOSI: 1.4 U5.5 U6.14 U7.15 | length 58.8
  Top Layer w0.25: U7.15@125.444,88.043 126.543,88.043 127.25,88.75 v1(127.25,89.5) ; v1(126.5,96.25) 133.12,102.87 U6.14@133.959,102.87 136.62,102.87 137.25,103.5 137.25,106 ; U5.5@133.385,117.15 133.385,115.115 137.25,111.25 137.25,106 ; 1.4@146,91.71 145.64,91.71 144.615,92.735 144.615,101.635 140.25,106 137.25,106
  Bottom Layer w0.25: v1(126.5,96.25) 126.5,90.5 127.25,89.75 v1(127.25,89.5)
ATMEGA_SCK: 1.3 U5.4 U6.13 U7.17 | length 72.7
  Top Layer w0.25: U7.17@126.994,85.693 126.994,84.756 v1(128,83.75) ; U5.4@132.115,117.15 132.115,113.135 v1(132.5,112.75) ; U6.13@133.959,101.6 135.4,101.6 135.75,101.25 ; v1(137.75,101.25) 135.75,101.25 ; v1(139.25,85.75) 140.75,85.75 142.25,87.25 143.25,87.25 144.5,88.5 144.5,90.67 143.46,91.71 141.54,91.71 137.75,95.5 137.75,99.25 135.75,101.25
  Bottom Layer w0.25: v1(128,83.75) 128.75,83 135.5,83 136.275,83.775 137.275,83.775 v1(139.25,85.75) ; v1(132.5,112.75) 138.5,112.75 145,106.25 145,105 141.25,101.25 v1(137.75,101.25)
CAN_N: P6.8 R47.1 U4.6 | length 39.4
  Top Layer w0.381: P6.8@89.154,94.361 91.793,97 v1(92.25,97) ; U4.6@120.166,103.65 U4.6@120.021,103.505 121.245,103.505 v1(122,102.75)
  Bottom Layer w0.25: R47.1@117.5,103.45 117.525,103.475 121.275,103.475 v1(122,102.75)
  Bottom Layer w0.381: v1(92.25,97) 98.713,103.463 117.487,103.463 R47.1@117.5,103.45
CAN_P: P6.9 R47.2 U4.7 | length 47
  Top Layer w0.381: P6.9@85.014,90.221 85.014,91.014 87.25,93.25 87.25,95.5 90.75,99 v1(92.25,99) ; U4.7@120.021,104.775 121.975,104.775 v1(122,104.75)
  Bottom Layer w0.25: R47.2@117.5,105.05 117.525,105.025 121.725,105.025 v1(122,104.75)
  Bottom Layer w0.381: v1(92.25,99) 98.25,105 117.45,105 R47.2@117.5,105.05
CS: U2.41 U5.14 | length 35.6
  Top Layer w0.127: v1(118.8,154.35) 118.889,154.261 120.375,154.261 120.463,154.35 U2.41@121.525,154.35
  Top Layer w0.25: v1(130.75,128.875) 130.75,126.645 U5.14@130.845,126.55
  Bottom Layer w0.25: v1(118.8,154.35) 118.8,140.825 v1(130.75,128.875)
GLV: 1.6 C37.1 C38.2 C39.2 C40.1 C41.2 P4.3 P4.4 P6.1 P6.2 P6.3 P6.4 P6.5 Q15.3 R44.1 R45.1 R46.2 R49.1 SW1.4 U3.2 U3.4 U4.2 U5.2 U5.8 U6.9 U7.3 U7.5 Y1.2 Y2.2 | length 6.6
  Top Layer w0.25: v1(129.075,96.1) 129.219,95.956 129.219,94.568 U7.5@129.394,94.393 ; U7.3@130.994,94.393 131.169,94.568 131.169,95.944 v1(131.325,96.1)
  Bottom Layer w0.25: v1(129.075,96.1) 129.116,96.1 129.941,95.275 130.459,95.275 131.284,96.1 v1(131.325,96.1)
  other v1: 135.3,85 128.25,88.05
"INT CAN": U6.12 U7.32 | length 9.7
  Top Layer w0.25: U6.12@133.959,100.33 134.92,100.33 v1(136,99.25) ; U7.32@134.144,92.843 134.75,93.449 v1(134.75,94)
  Bottom Layer w0.25: v1(134.75,94) 136,95.25 v1(136,99.25)
isoSPI_N: R13.1 U1.3 U2.47 | length 48.6
  Top Layer w0.25: U2.47@121.525,157.346 120.429,157.346 119.925,157.85 119.925,158.325 121.375,159.775 R13.1@123.293,159.775 127.568,164.05 136.475,164.05 138.125,162.4 138.125,144.575 136.025,142.475 U1.3@131.775,142.475
isoSPI_P: R13.2 U1.1 U2.48 | length 40
  Top Layer w0.25: U2.48@121.525,157.85 122.968,157.85 R13.2@123.293,158.175 128.193,163.075 135.925,163.075 137,162 137,145.575 136.44,145.015 U1.1@131.775,145.015
LTC_CS: U5.3 U7.1 | length 28
  Top Layer w0.25: v1@129.921,113.079 v1(130,113) 130.845,113.845 U5.3@130.845,117.15 ; U7.1@132.594,94.393 132.643,94.393 v1(133.75,95.5)
  Bottom Layer w0.25: v1(130,113) 129.75,112.75 128.25,112.75 127.75,112.25 127.75,101.5 v1(133.75,95.5)
MCP_CS: U6.16 U7.13 | length 22.8
  Top Layer w0.25: v1(124,89.75) 125.337,89.75 U7.13@125.444,89.643 ; v1(127.5,99.5) 131,103 v1(131,103.25) ; v1(132.25,105.25) 133.799,105.25 U6.16@133.959,105.41 U6.16@134.59,105.41
  Bottom Layer w0.25: v1(124,89.75) 124,96 v1(127.5,99.5) ; v1(131,103.25) 131,104 v1(132.25,105.25)
NetC1_1: C1.1 Q5.2 R1.2 | length 48.6
  Top Layer w0.25: R1.2@94.675,167.347 98.472,167.347 C1.1@98.925,167.8 98.925,168.825 99.375,169.275 v1(100.35,169.275) ; Q5.2@125.825,152.575 128.625,152.575 v1(128.675,152.525)
  Bottom Layer w0.25: v1(100.35,169.275) 117.75,169.275 128.675,158.35 v1(128.675,152.525)
NetC1_2: C1.2 C2.1 | length 2.3
  Top Layer w0.25: C1.2@100.525,167.8 102.8,167.8 C2.1@102.85,167.85
NetC3_1: C3.1 C4.2 | length 3
  Top Layer w0.25: C4.2@103.2,164.875 104.325,164.875 104.525,165.075 v1(104.625,165.075)
  Bottom Layer w0.25: C3.1@103.2,164.9 103.375,165.075 v1(104.625,165.075)
NetC3_2: C3.2 C6.1 D1.1 D2.2 P1.3 R6.2 R7.1 | length 44.8
  Top Layer w0.25: v1(104.375,163.275) 106.025,163.275 D1.1@106.85,162.45 109.65,162.45 R7.1@109.675,162.475 109.675,161.425 v1(109.925,161.175) ; v1(121.125,163.925) 121.8,163.925 P1.3@127.9,170.025
  Bottom Layer w0.25: R6.2@99.3,164.675 99.525,164.9 C3.2@101.6,164.9 ; C6.1@101.6,162 101.6,163.25 ; C3.2@101.6,164.9 101.6,163.25 ; D2.2@106.85,162.45 106.025,163.275 v1(104.375,163.275) 101.625,163.275 101.6,163.25 ; v1(109.925,161.175) 109.925,158.791 112.141,156.575 113.775,156.575 v1(121.125,163.925)
NetC4_1: C4.1 D1.2 R3.2 U2.2 | length 23.1
  Top Layer w0.127: D1.2@106.85,164.85 112.675,164.85 112.825,164.7 112.825,157.6 113.075,157.35 U2.2@114.1,157.35
  Top Layer w0.25: R3.2@99.325,164.65 99.55,164.875 C4.1@101.6,164.875 102.775,166.05 105.65,166.05 D1.2@106.85,164.85
NetC5_1: C5.1 C6.2 | length 3.6
  Top Layer w0.25: C5.1@103.2,162 104.95,162 v1(105,162.05)
  Bottom Layer w0.25: C6.2@103.2,162 104.95,162 v1(105,162.05)
NetC5_2: C5.2 C8.1 D2.1 D3.2 P1.1 R10.2 U2.6 | length 44.7
  Top Layer w0.127: D3.2@106.825,156.85 108.325,155.35 U2.6@114.1,155.35
  Top Layer w0.25: R10.2@99.3,159.475 C8.1@101.575,159.475 ; v1(105.475,164.125) 104.225,164.125 103.35,163.25 102.15,163.25 101.6,162.7 C5.2@101.6,162 101.6,159.5 C8.1@101.575,159.475 ; D3.2@106.825,156.85 106.825,157.1 105.45,158.475 102.075,158.475 101.575,158.975 C8.1@101.575,159.475 ; v1(108.05,165.5) 108.05,165.775 108.7,166.425 v1(110.625,166.425) ; v1(115.8,167.925) 120.8,167.925 P1.1@122.9,170.025
  Bottom Layer w0.25: v1(105.475,164.125) 106.2,164.85 D2.1@106.85,164.85 107.125,164.85 107.775,165.5 v1(108.05,165.5) ; v1(110.625,166.425) 112.125,167.925 v1(115.8,167.925)
NetC7_1: C7.1 C8.2 | length 2.8
  Top Layer w0.25: C8.2@103.175,159.475 103.375,159.275 v1(104.525,159.275)
  Bottom Layer w0.25: C7.1@103.225,159.45 104.4,159.45 104.525,159.325 v1(104.525,159.275)
NetC7_2: C7.2 C10.1 D3.1 D4.2 R14.2 U2.8 | length 30.4
  Top Layer w0.127: U2.8@114.1,154.35 116.425,154.35 v1(116.5,154.275)
  Top Layer w0.25: v1(104.5,160.425) 105.05,160.425 106.225,159.25 D3.1@106.825,159.25
  Bottom Layer w0.25: R14.2@99.3,159.475 99.325,159.45 C7.2@101.625,159.45 ; C10.1@101.625,156.475 101.625,158.1 ; v1(104.5,160.425) 102.6,160.425 C7.2@101.625,159.45 ; v1(116.5,154.275) 115.475,155.3 109.25,155.3 107.7,156.85 D4.2@106.825,156.85 106.417,157.258 105.367,157.258 105.184,157.075 104.3,157.075 103.275,158.1 101.625,158.1 ; 101.625,158.1 C7.2@101.625,159.45
NetC9_1: C9.1 C10.2 | length 5
  Top Layer w0.25: C9.1@103.225,156.5 103.4,156.675 105.613,156.675 105.605,156.667 v1(105.605,156.583)
  Bottom Layer w0.25: C10.2@103.225,156.475 105.498,156.475 v1(105.605,156.583)